# Altium PCB AT short bus with break-away tab ( 7 x 4.5 inches).PCBDOC
Units mil, origin at the board's own origin, x right, y up, seen from the top; angles counter-clockwise.
Board outline 7000 x 5250 mil, 10 copper layers (TopLayer, MidLayer1, MidLayer2, MidLayer3, MidLayer4, MidLayer5, MidLayer6, MidLayer7, MidLayer8, BottomLayer); 1 components, 0 nets, 103 pads, 0 vias.
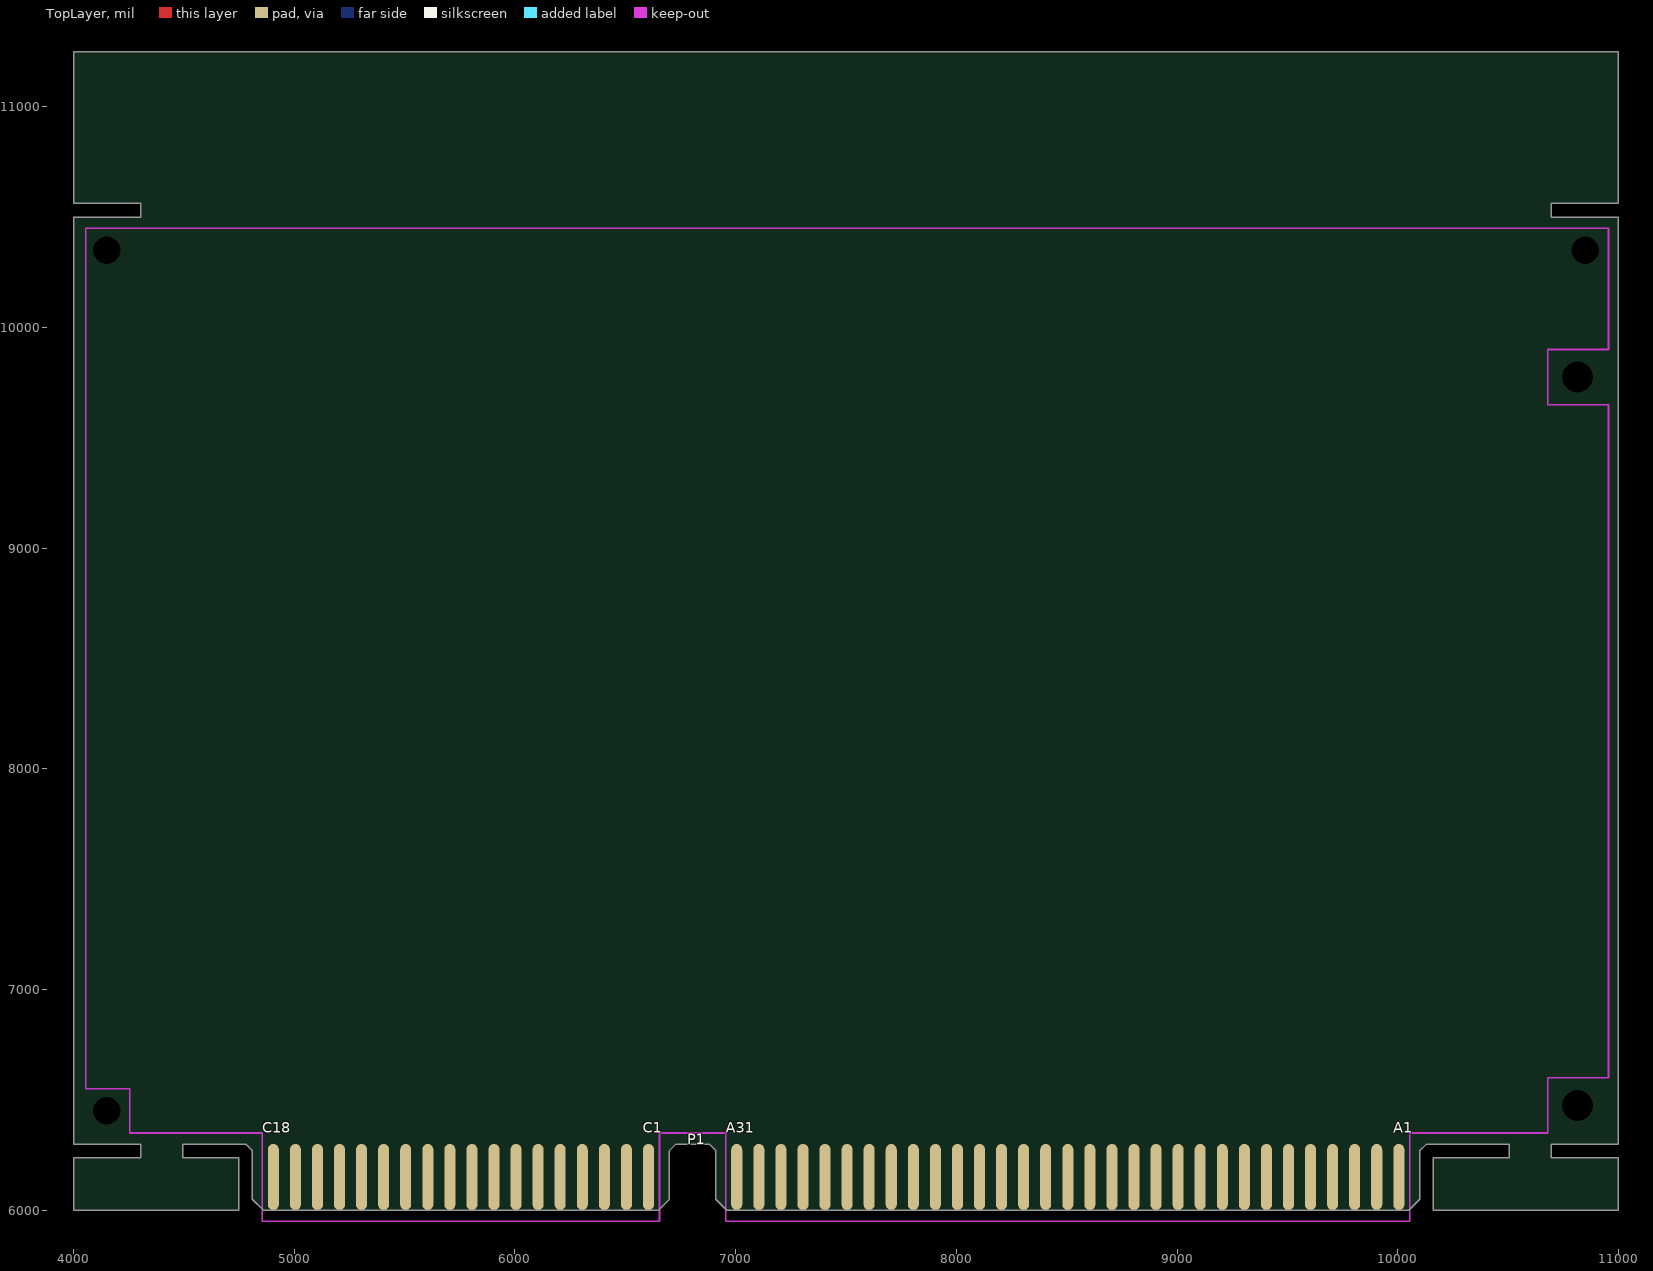
[diagram p0: TopLayer view]
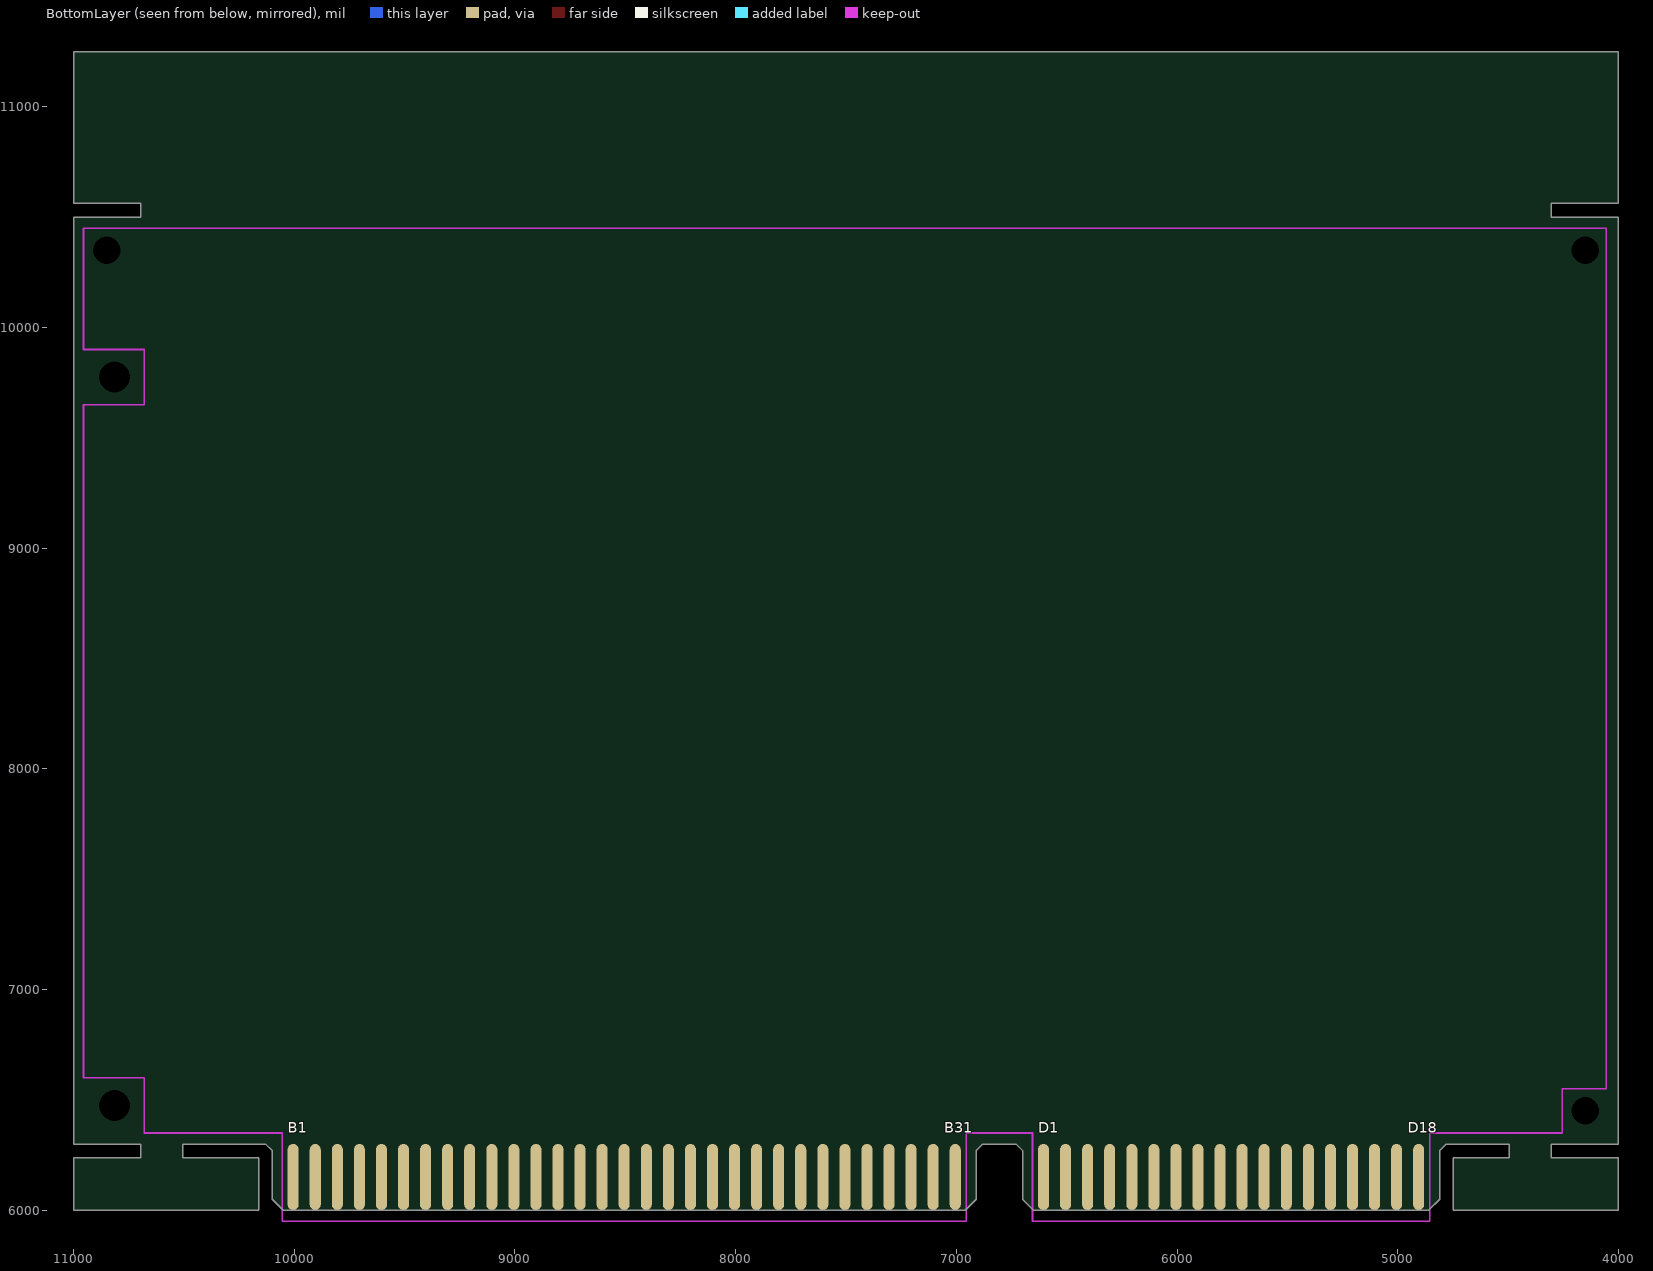
[diagram p1: BottomLayer view, seen from below]
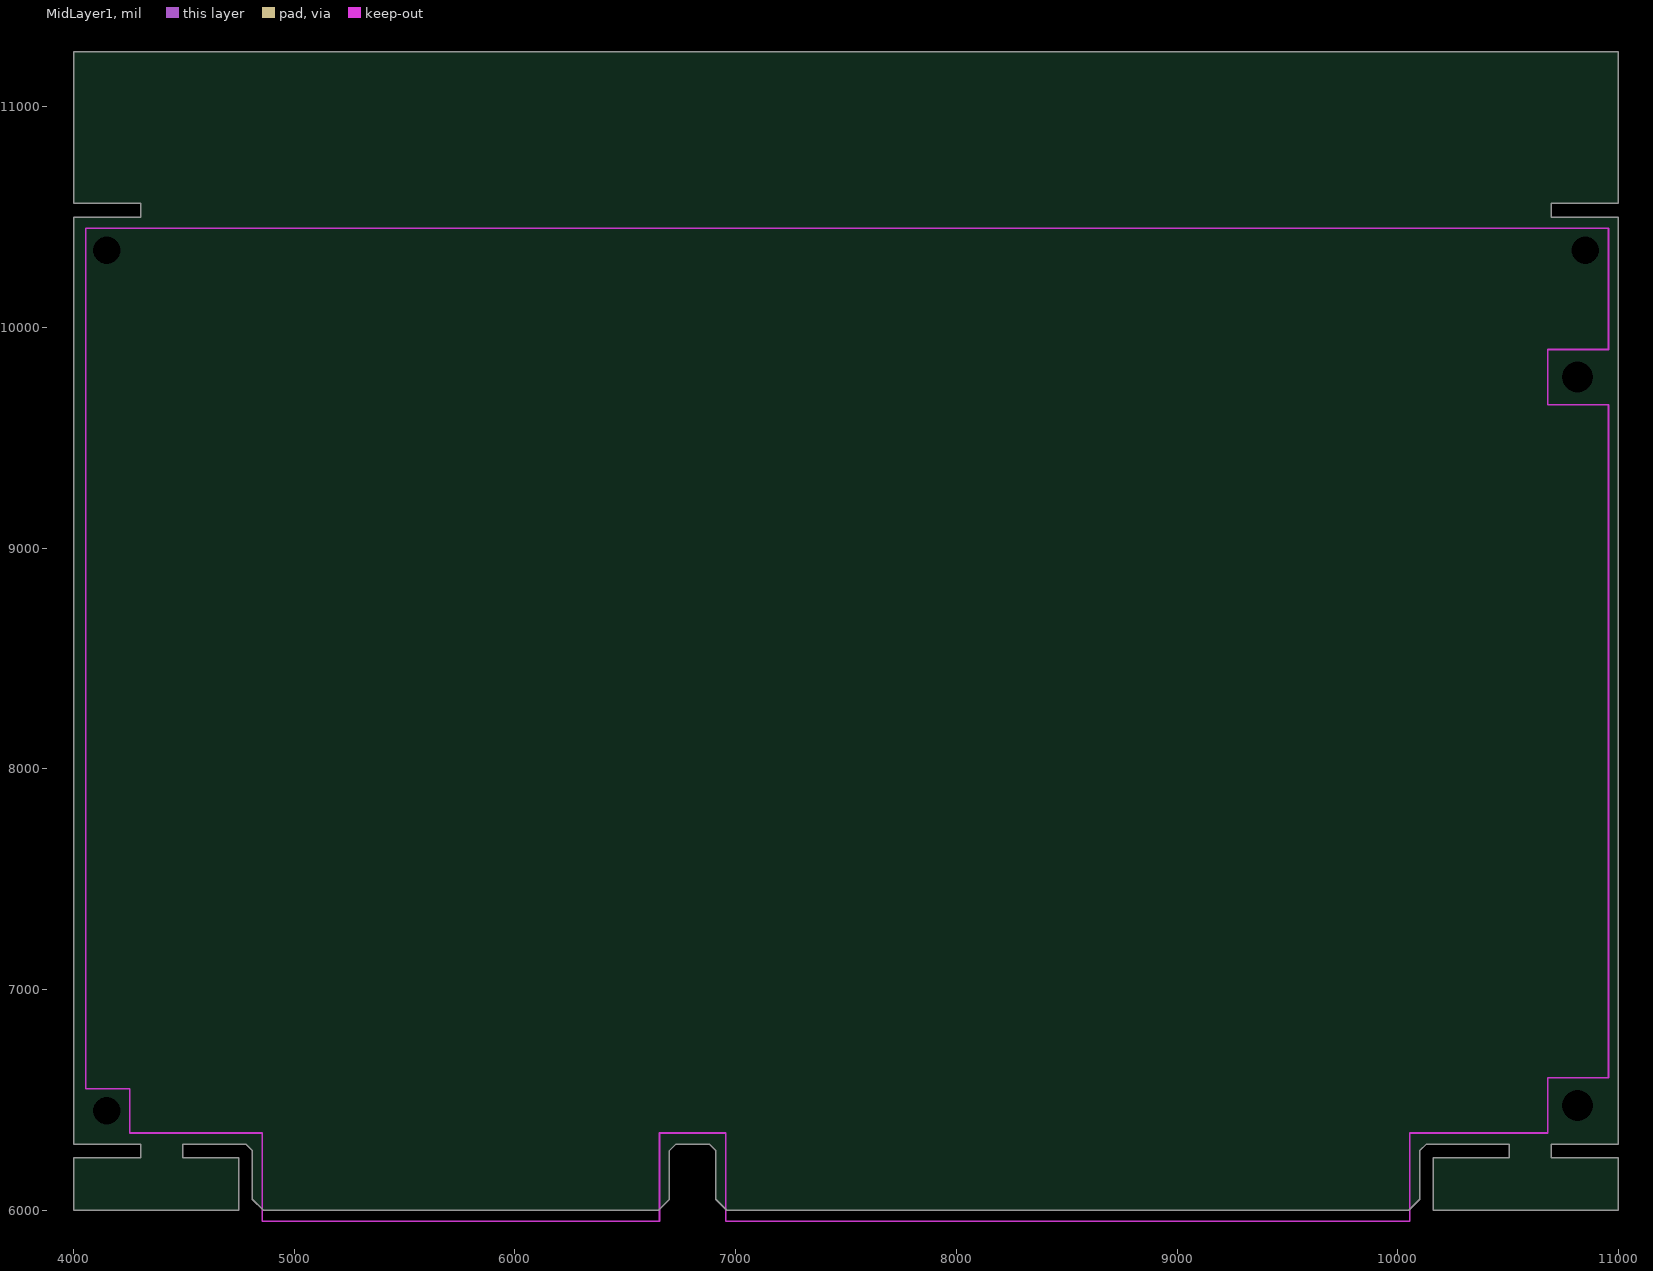
[diagram p2: MidLayer1]
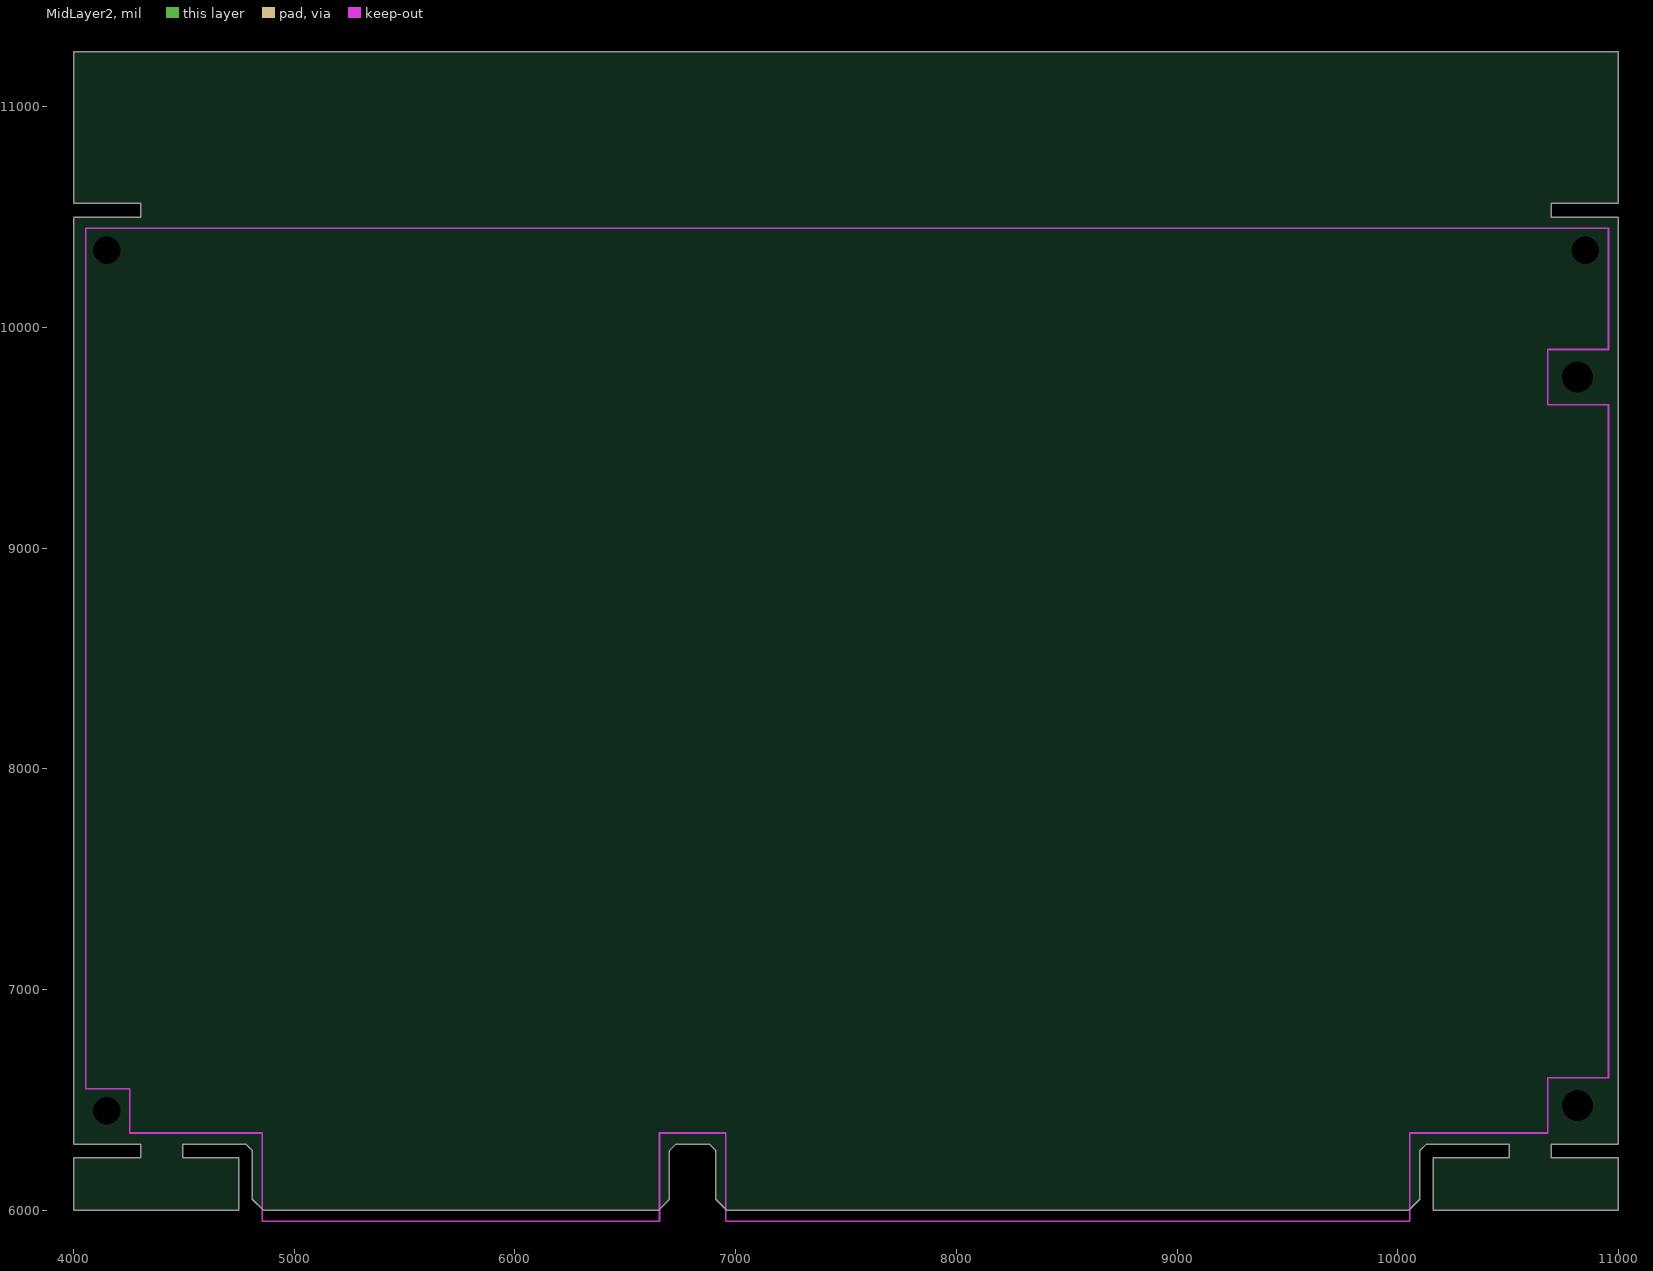
[diagram p3: MidLayer2]
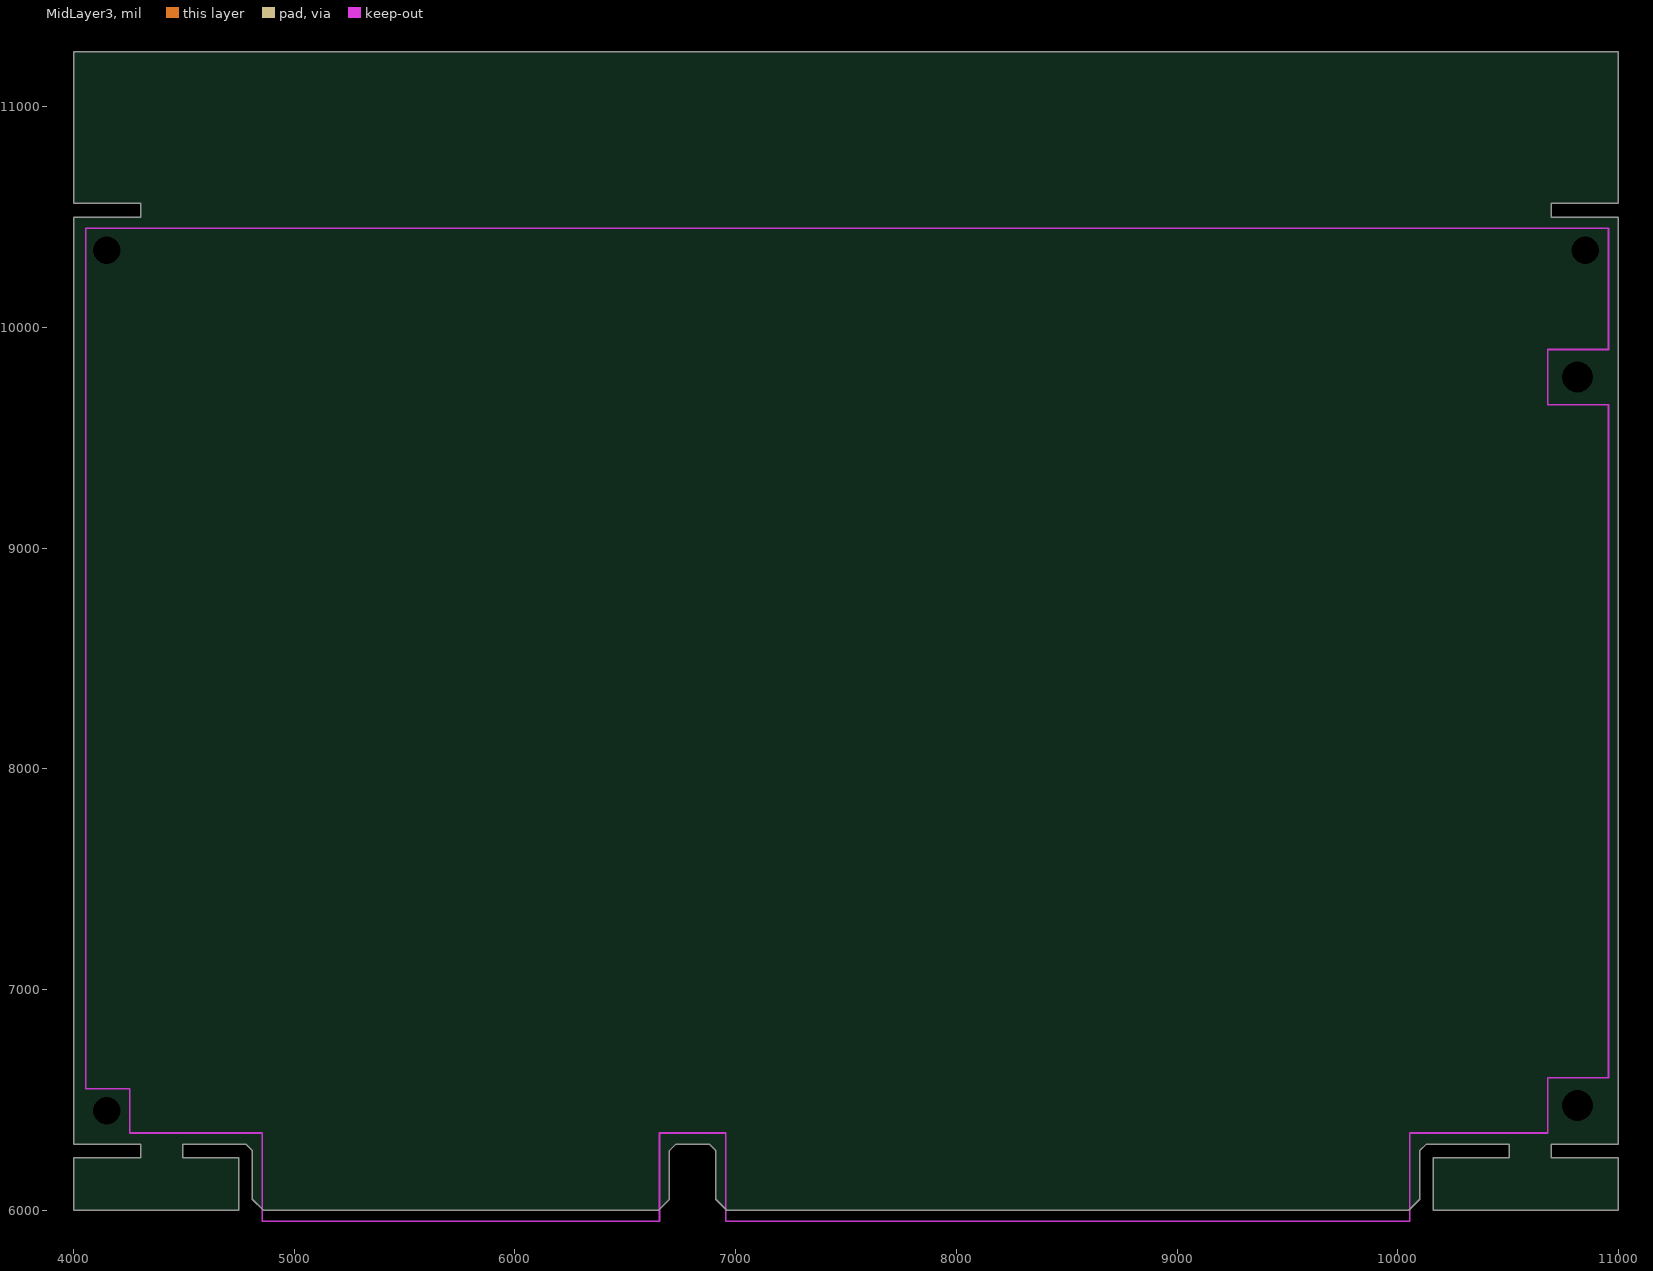
[diagram p4: MidLayer3]
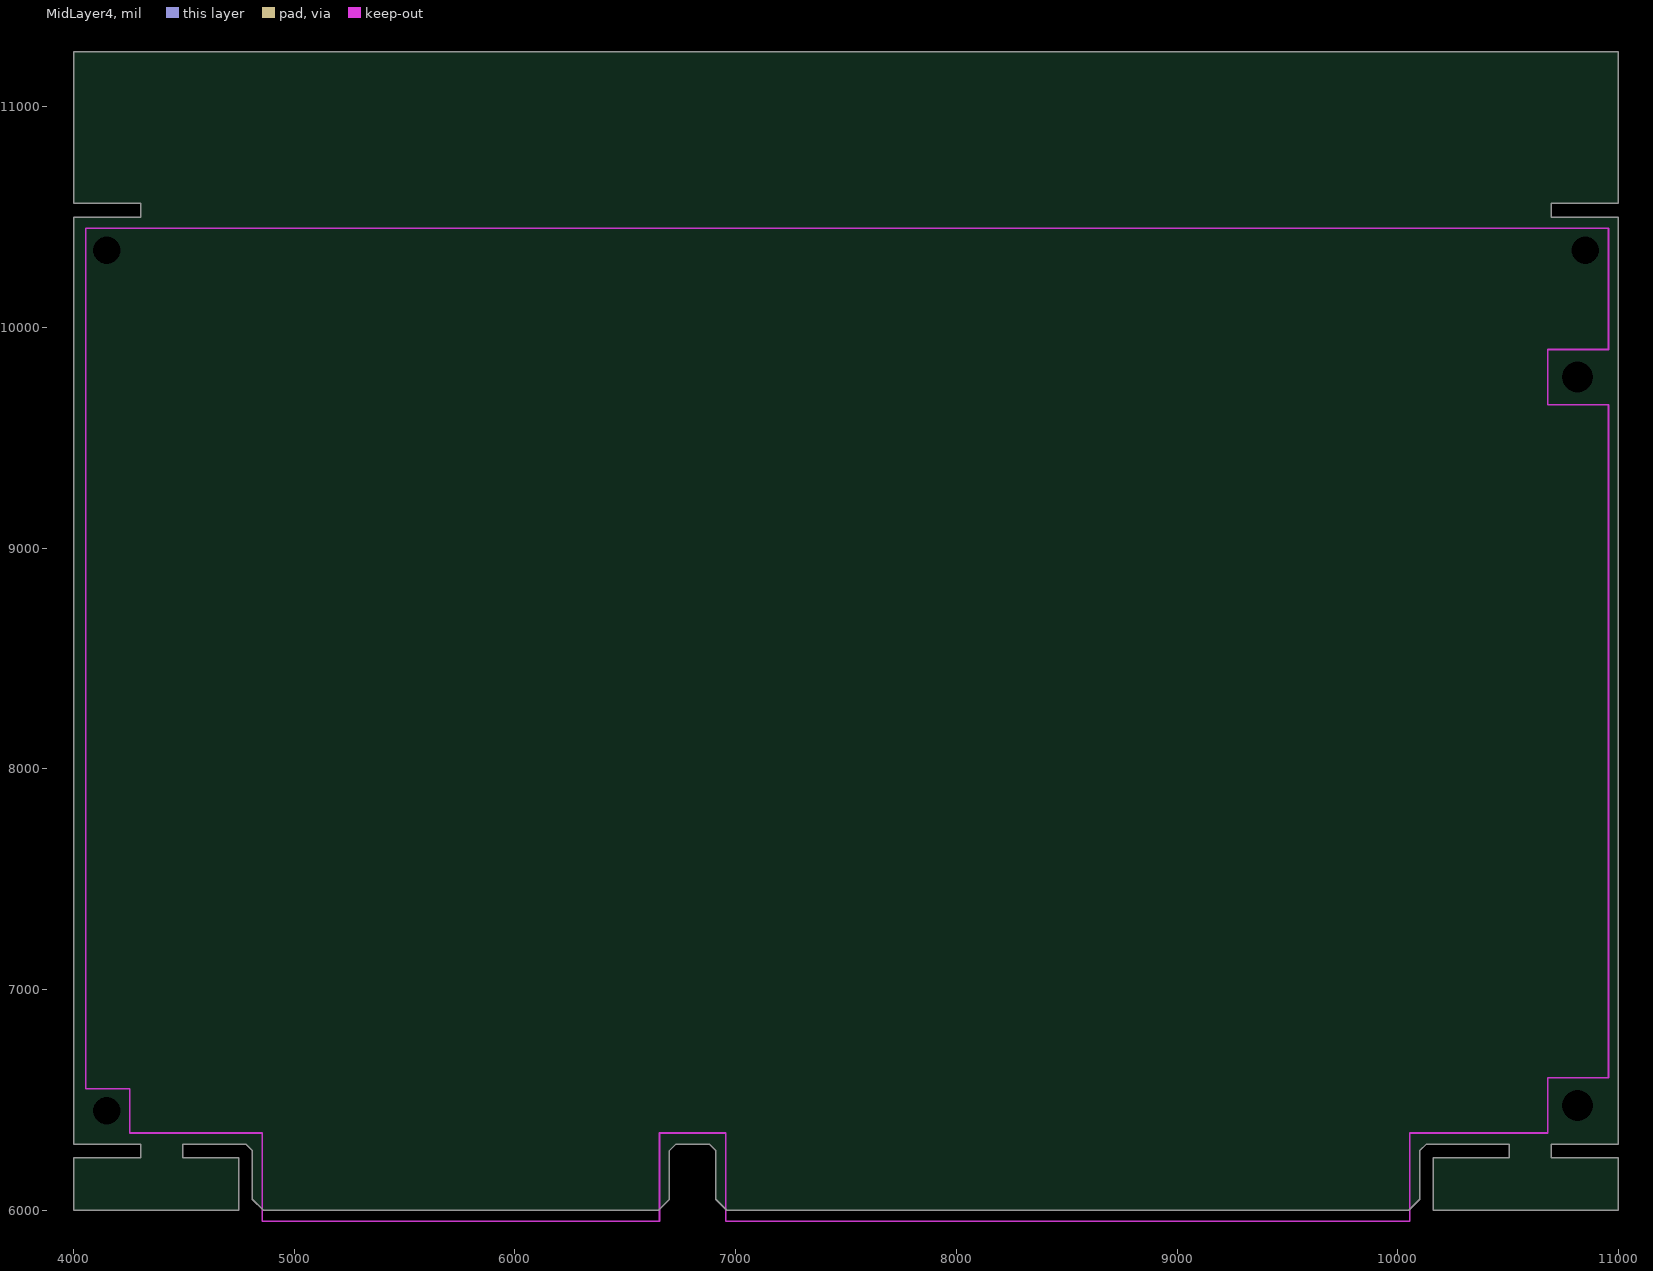
[diagram p5: MidLayer4]
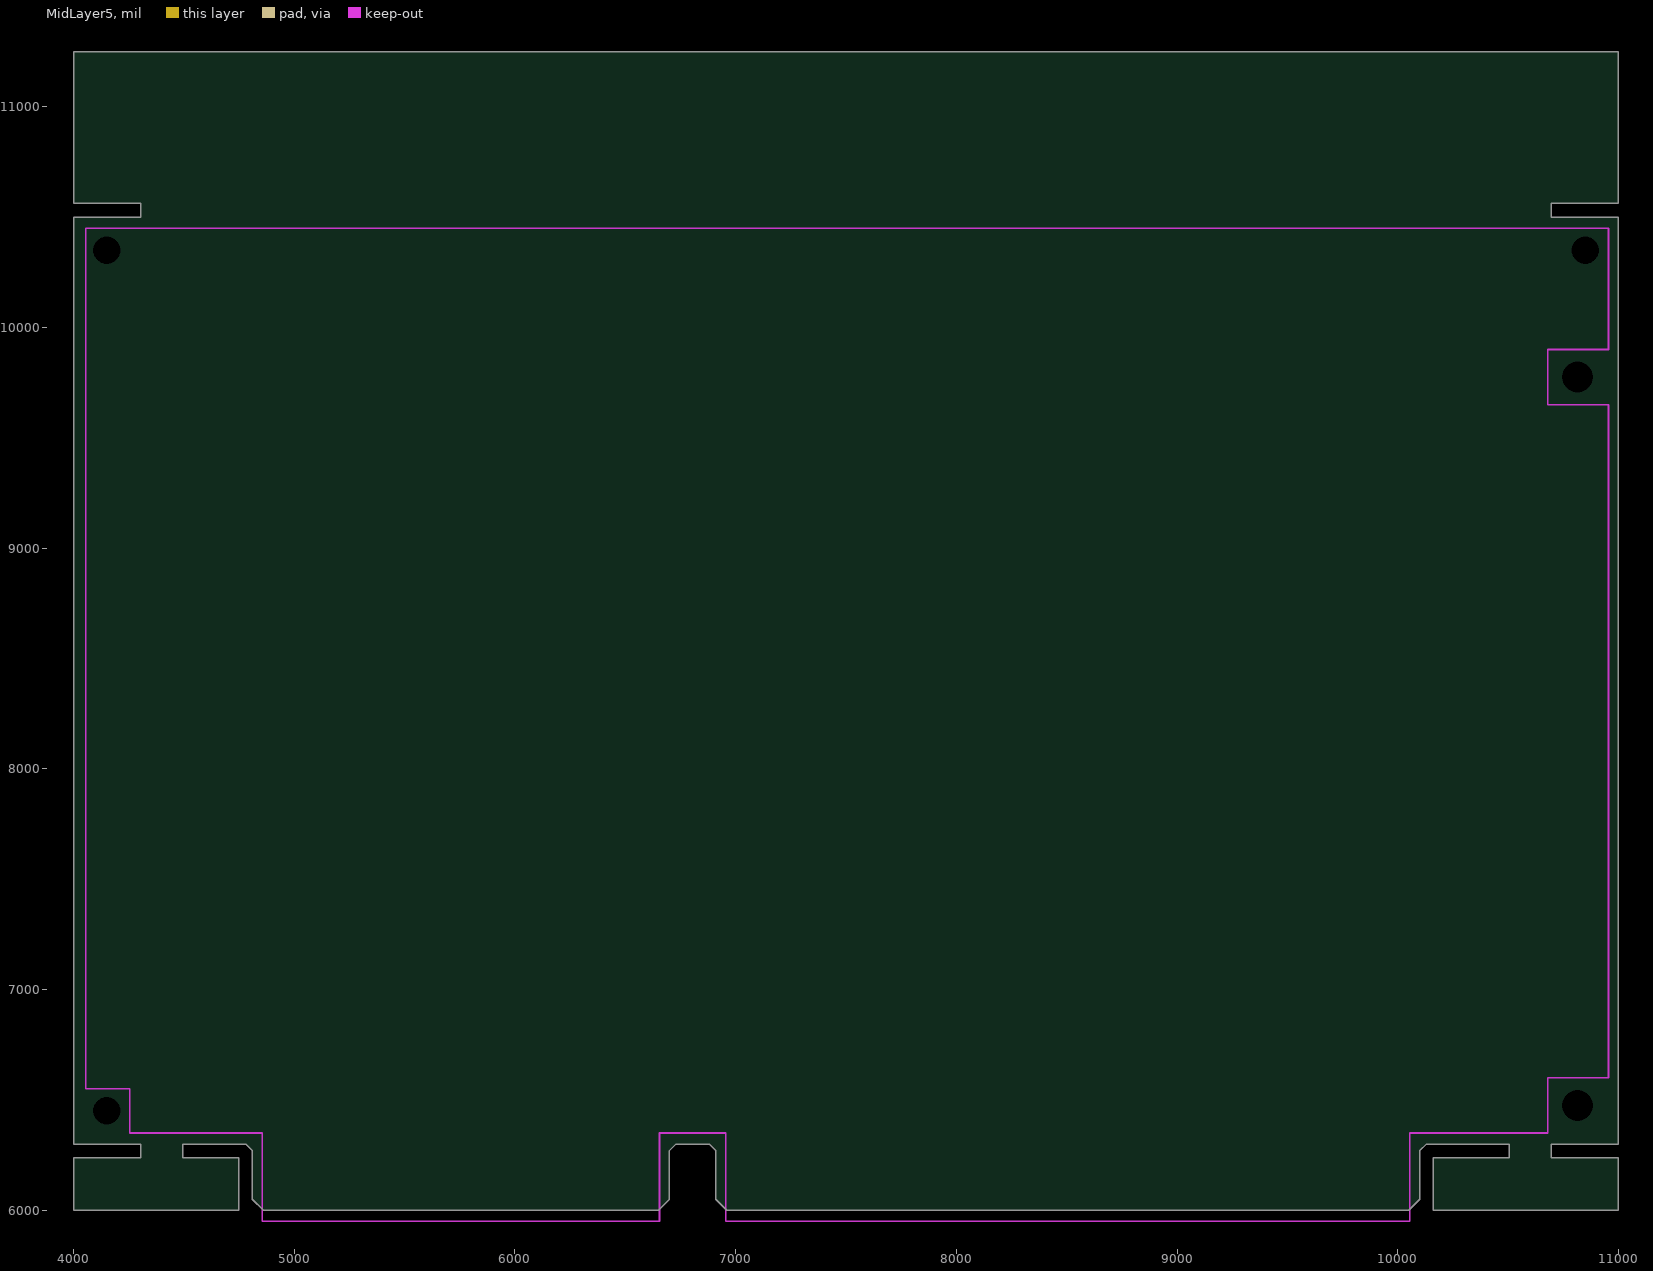
[diagram p6: MidLayer5]
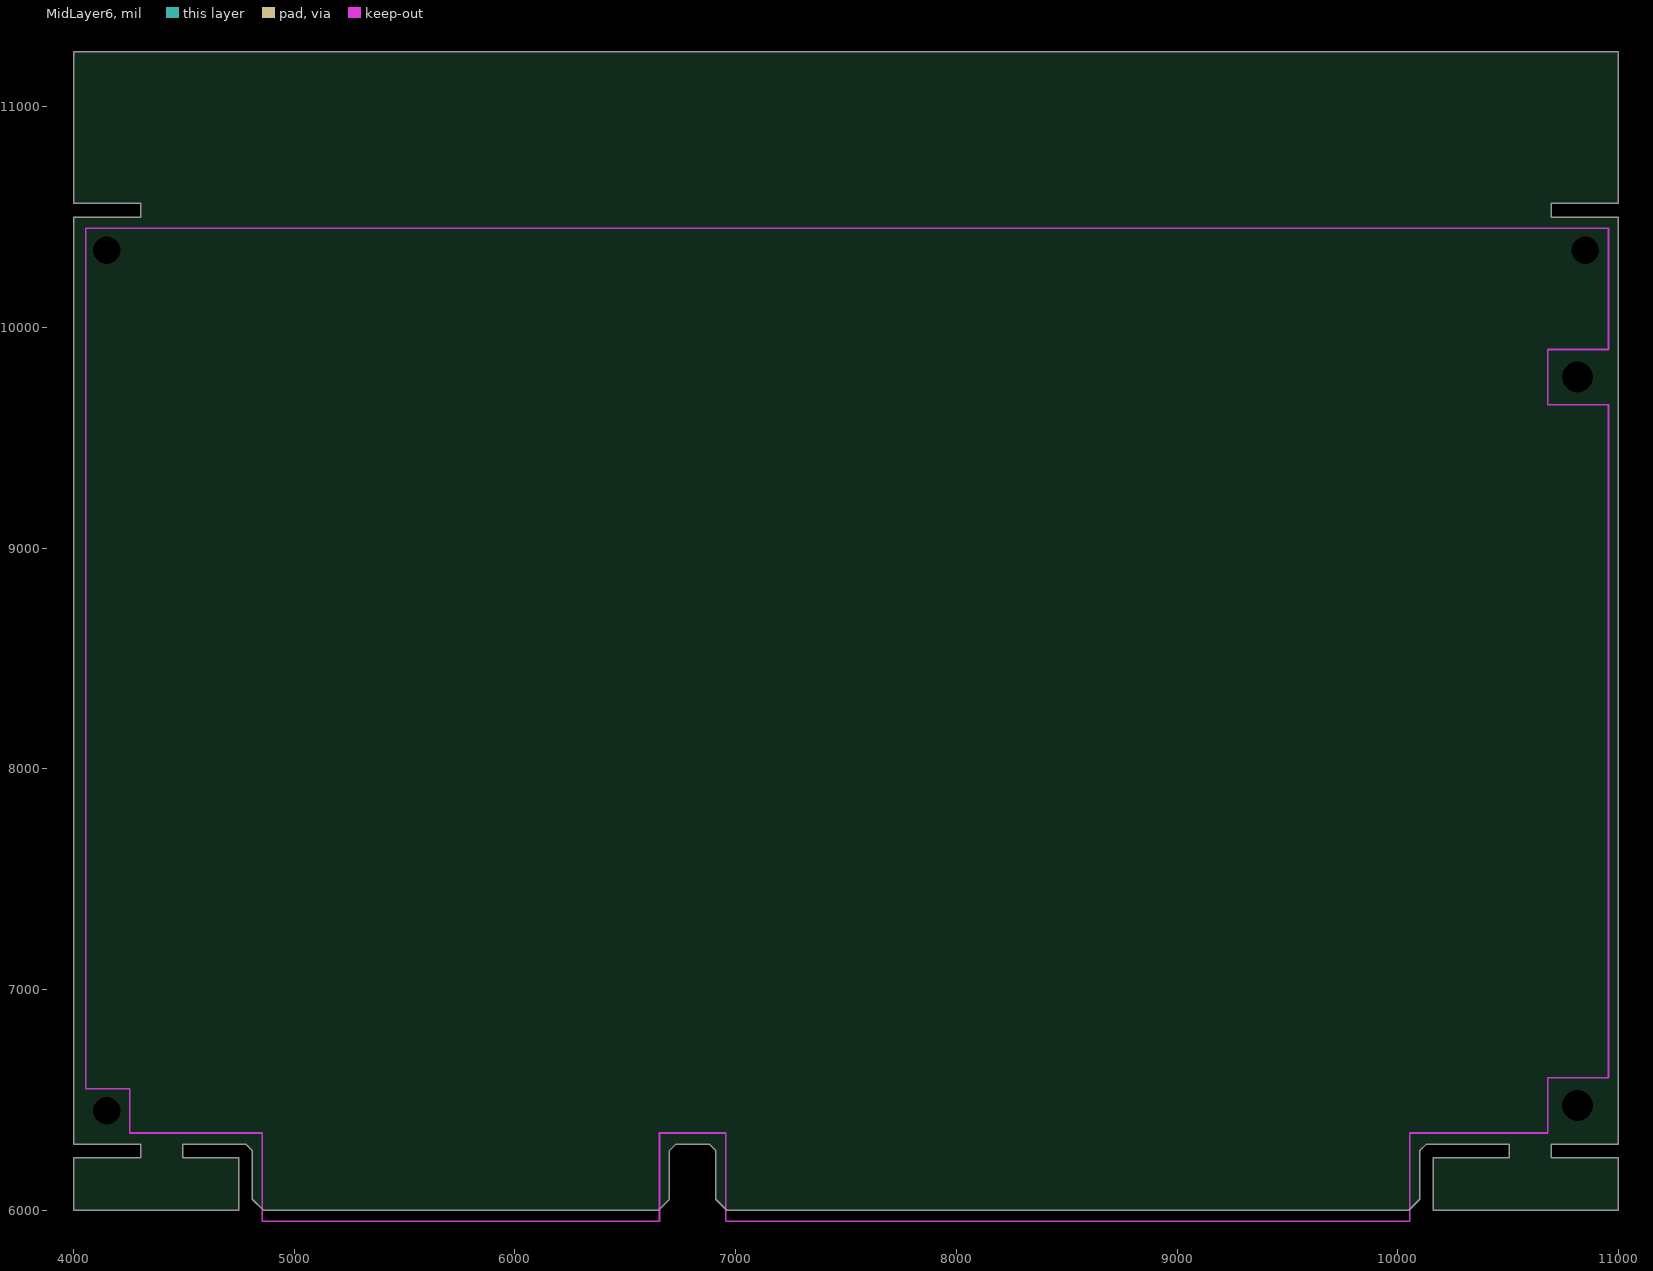
[diagram p7: MidLayer6]
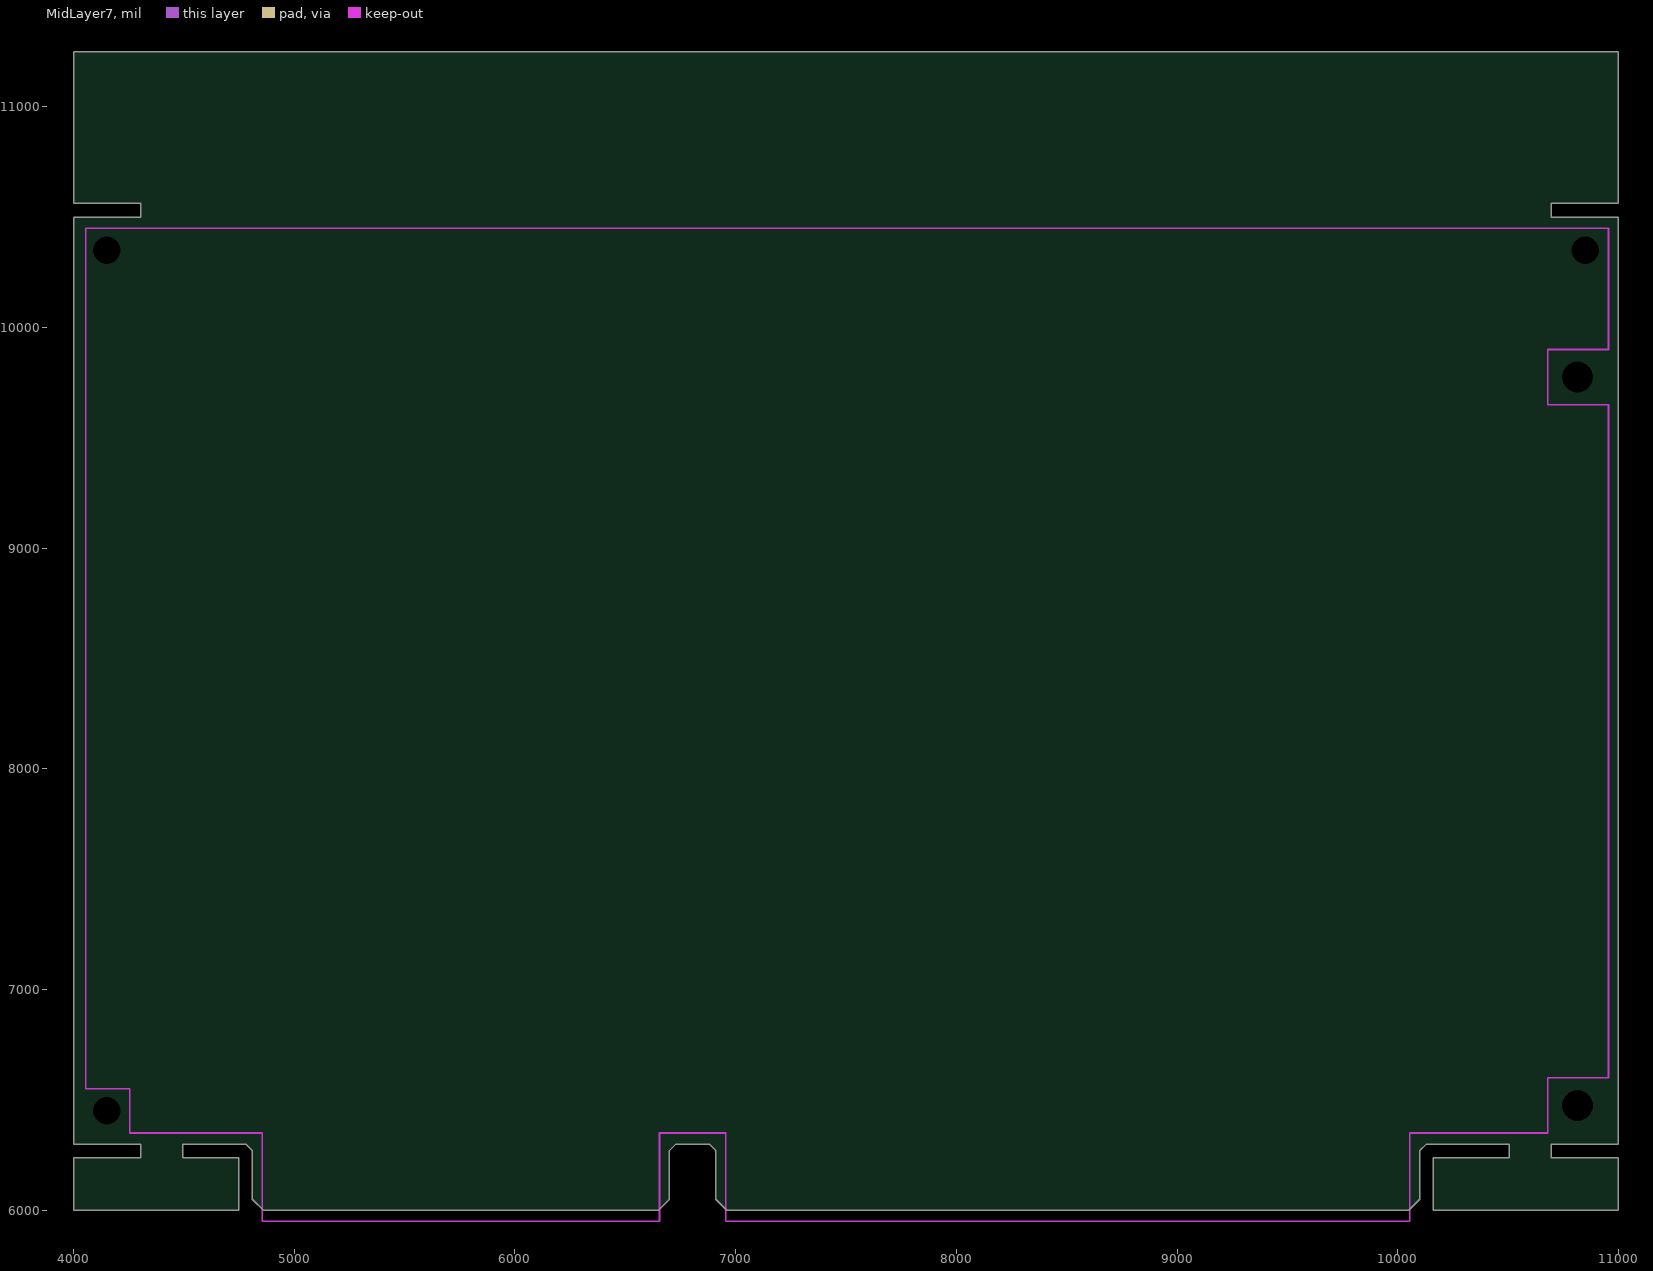
[diagram p8: MidLayer7]
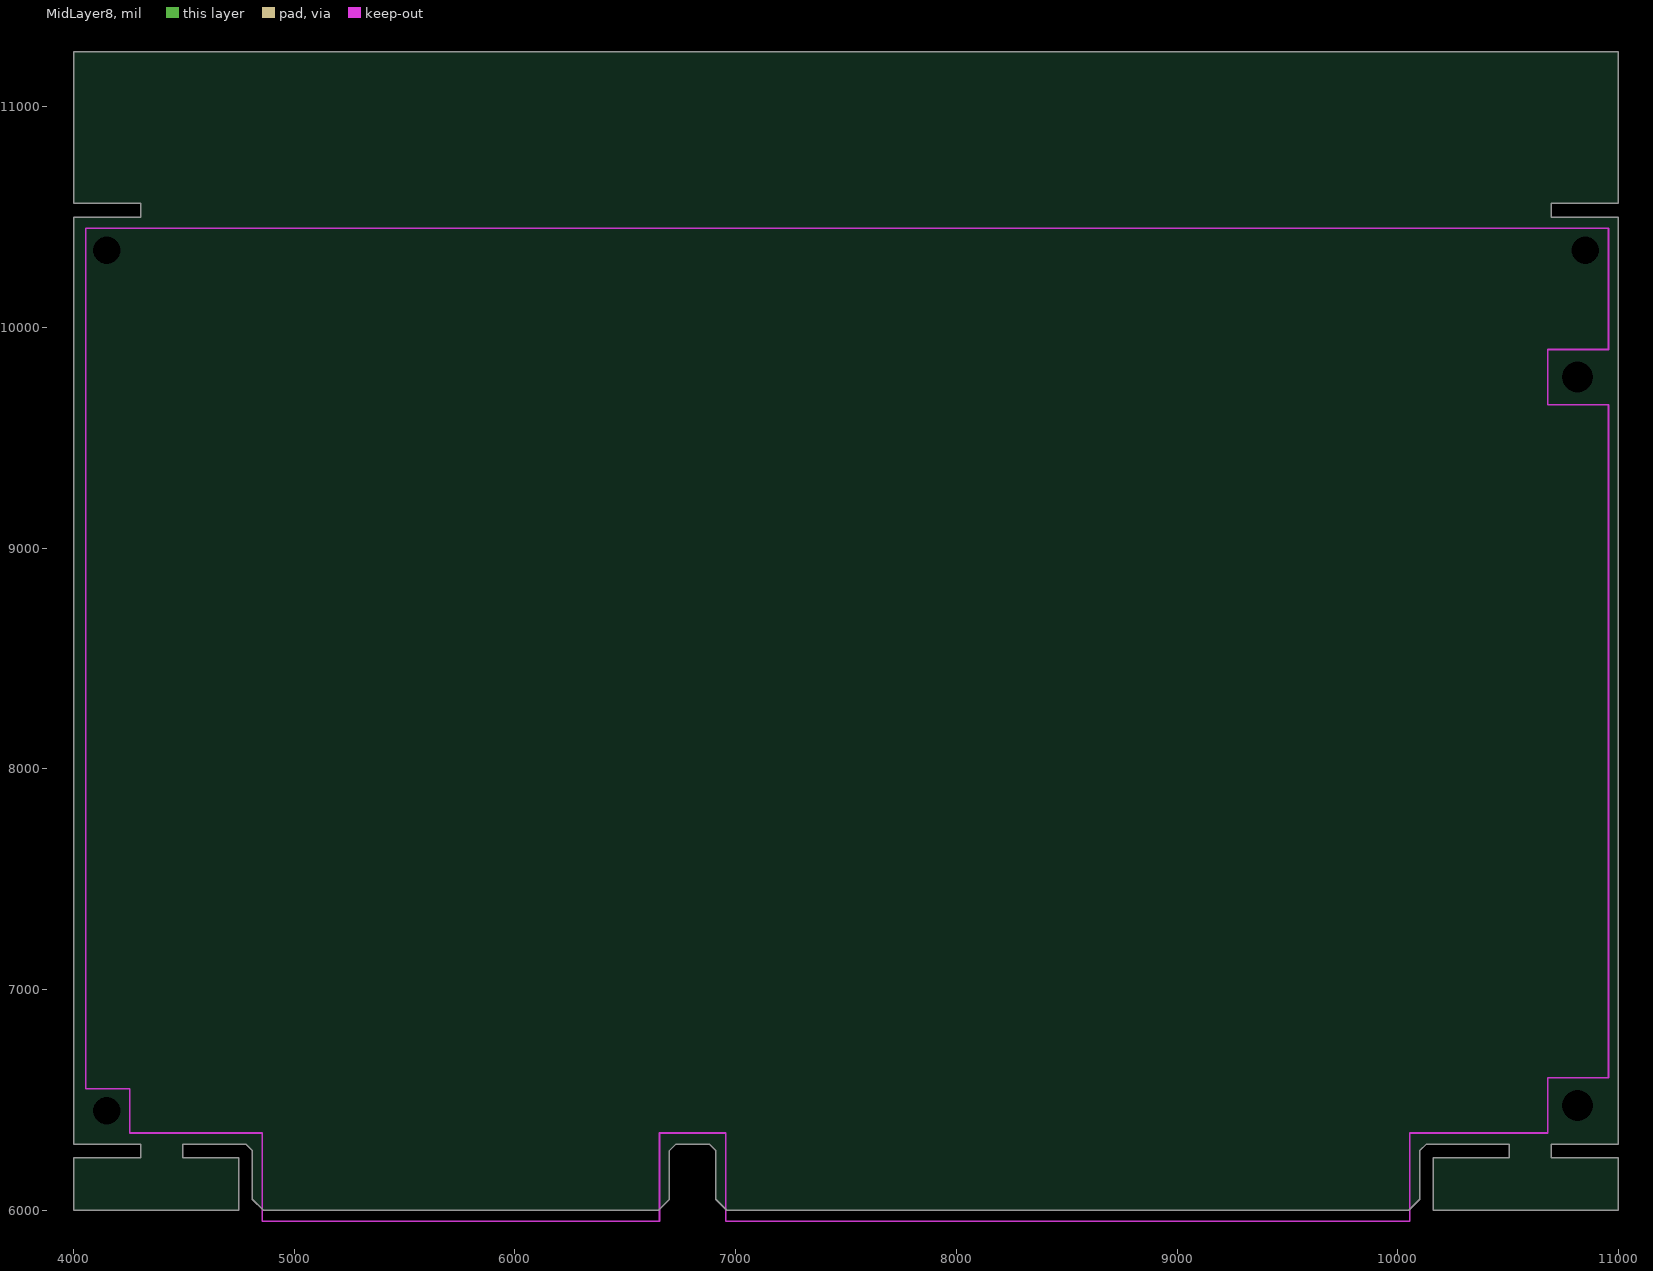
[diagram p9: MidLayer8]

## Layer stack, top to bottom
TopLayer: signal copper 1.4
Dielectric: core 12.6, FR-4, Dk 4.8
MidLayer1: signal copper 1.4
Dielectric: prepreg 12.6, FR-4, Dk 4.8
MidLayer2: signal copper 1.4
Dielectric: core 12.6, FR-4, Dk 4.8
MidLayer3: signal copper 1.4
Dielectric: prepreg 12.6, FR-4, Dk 4.8
MidLayer4: signal copper 1.4
Dielectric: core 12.6, FR-4, Dk 4.8
MidLayer5: signal copper 1.4
Dielectric: prepreg 12.6, FR-4, Dk 4.8
MidLayer6: signal copper 1.4
Dielectric: core 12.6, FR-4, Dk 4.8
MidLayer7: signal copper 1.4
Dielectric: prepreg 12.6, FR-4, Dk 4.8
MidLayer8: signal copper 1.4
Dielectric: core 12.6, FR-4, Dk 4.8
BottomLayer: signal copper 1.4

## Board outline
4000,6000 4748,6000 4748,6238 4495,6238 4495,6300 4780,6300 4810,6270 4810,6050 4860,6000 6650,6000 6700,6050 6700,6270 6730,6300 6880,6300 6910,6270 6910,6050 6960,6000 10050,6000 10100,6050 10100,6270 10130,6300 10505,6300 10505,6238 10162,6238 10162,6000 11000,6000 11000,6238 10695,6238 10695,6300 11000,6300 11000,10500 10695,10500 10695,10562 11000,10562 11000,11250 4000,11250 4000,10562 4305,10562 4305,10500 4000,10500 4000,6300 4305,6300 4305,6238 4000,6238

## Design rules (kind name [scope] priority, off if disabled: settings)
Clearance [All] p1: gap=10
FabricationTestPointUsage TestPointUsage [All] p1: valid=0 allowmultiple=FALSE
FabricationTestpoint Testpoint [All] p1: side=3 testpointundercomponent=TRUE minsize=40 maxsize=100 preferedsize=60 minholesize=20 maxholesize=40 preferedholesize=32 testpointgrid=1 allowsidetop=TRUE allowsidebottom=TRUE usegrid=TRUE gridtolerance=0.01
PasteMaskExpansion PasteMaskExpansion_1 [InComponent('P1')] p1: expansion=-150
PasteMaskExpansion [All] p2: expansion=0
PlaneClearance [All] p1: clearance=10
PolygonConnect [All] p1: connectstyle=Relief reliefconductorwidth=10 reliefentries=4 polygonreliefangle="90 Angle"
RoutingVias [All] p1: holewidth=28 width=50 viastyle="Through Hole" minholewidth=28 minwidth=50 maxholewidth=28 maxwidth=50
SilkscreenOverComponentPads [All] p1: minsilkscreentomaskgap=10
SolderMaskExpansion SolderMaskExpansion_1 [HasPad('Free-22')] p1: expansion=20
SolderMaskExpansion [HasPad('Free-21')] p2: expansion=20
SolderMaskExpansion SolderMaskExpansion_2 [All] p3: expansion=2
Width [All] p1: maxlimit=10 minlimit=10 preferedwidth=10
23 further rules are at their usual default settings.

## Components (designator, comment, footprint, x,y, rotation, side; value= is the part's Value field where it differs from the comment)
P1 "PCATEDGE" PCATEDGE 10005,6150 r0 top locked

## Footprints (in the part's own frame and the unit in brackets; to place one, negate y for a bottom-side part, rotate by r counter-clockwise, add the part's x,y. Pads: shape width x height; smd on the part's side, far side on the other; paste and mask are expansions set on the pad)
PCATEDGE [mil]
  oval 50x300 smd: A1(0,0) A2(-100,0) A3(-200,0) A4(-300,0) A5(-400,0) A6(-500,0) A7(-600,0) A8(-700,0) A9(-800,0) A10(-900,0) A11(-1000,0) A12(-1100,0) A13(-1200,0) A14(-1300,0) A15(-1400,0) A16(-1500,0) A17(-1600,0) A18(-1700,0) A19(-1800,0) A20(-1900,0) A21(-2000,0) A22(-2100,0) A23(-2200,0) A24(-2300,0) A25(-2400,0) A26(-2500,0) A27(-2600,0) A28(-2700,0) A29(-2800,0) A30(-2900,0) A31(-3000,0) C1(-3400,0) C2(-3500,0) C3(-3600,0) C4(-3700,0) C5(-3800,0) C6(-3900,0) C7(-4000,0) C8(-4100,0) C9(-4200,0) C10(-4300,0) C11(-4400,0) C12(-4500,0) C13(-4600,0) C14(-4700,0) C15(-4800,0) C16(-4900,0) C17(-5000,0) C18(-5100,0)
  oval 50x300 smd far side: B1(0,0) B2(-100,0) B3(-200,0) B4(-300,0) B5(-400,0) B6(-500,0) B7(-600,0) B8(-700,0) B9(-800,0) B10(-900,0) B11(-1000,0) B12(-1100,0) B13(-1200,0) B14(-1300,0) B15(-1400,0) B16(-1500,0) B17(-1600,0) B18(-1700,0) B19(-1800,0) B20(-1900,0) B21(-2000,0) B22(-2100,0) B23(-2200,0) B24(-2300,0) B25(-2400,0) B26(-2500,0) B27(-2600,0) B28(-2700,0) B29(-2800,0) B30(-2900,0) B31(-3000,0) D1(-3400,0) D2(-3500,0) D3(-3600,0) D4(-3700,0) D5(-3800,0) D6(-3900,0) D7(-4000,0) D8(-4100,0) D9(-4200,0) D10(-4300,0) D11(-4400,0) D12(-4500,0) D13(-4600,0) D14(-4700,0) D15(-4800,0) D16(-4900,0) D17(-5000,0) D18(-5100,0)

## Free pads (board coordinates)
  round 50 hole 140: 1(10815,6475) 2(10815,9775)
  round 50 hole 125: 3(10850,10350) 4(4150,10350) 5(4150,6450)

## Nets (pads, with @x,y where several pads share a name; then routed paths per layer and width w, separated by ;. In a path a pad name is that pad's centre, name@x,y a point inside that pad or via, vN(x,y) a via of type N, cw(c..) or ccw(c..) an arc to the next point about the centre after c; other vN are vias at no path point)
pads on no net: P1.A1 P1.A2 P1.A3 P1.A4 P1.A5 P1.A6 P1.A7 P1.A8 P1.A9 P1.A10 P1.A11 P1.A12 P1.A13 P1.A14 P1.A15 P1.A16 P1.A17 P1.A18 P1.A19 P1.A20 P1.A21 P1.A22 P1.A23 P1.A24 P1.A25 P1.A26 P1.A27 P1.A28 P1.A29 P1.A30 P1.A31 P1.B1 P1.B2 P1.B3 P1.B4 P1.B5 P1.B6 P1.B7 P1.B8 P1.B9 P1.B10 P1.B11 P1.B12 P1.B13 P1.B14 P1.B15 P1.B16 P1.B17 P1.B18 P1.B19 P1.B20 P1.B21 P1.B22 P1.B23 P1.B24 P1.B25 P1.B26 P1.B27 P1.B28 P1.B29 P1.B30 P1.B31 P1.C1 P1.C2 P1.C3 P1.C4 P1.C5 P1.C6 P1.C7 P1.C8 P1.C9 P1.C10 P1.C11 P1.C12 P1.C13 P1.C14 P1.C15 P1.C16 P1.C17 P1.C18 P1.D1 P1.D2 P1.D3 P1.D4 P1.D5 P1.D6 P1.D7 P1.D8 P1.D9 P1.D10 P1.D11 P1.D12 P1.D13 P1.D14 P1.D15 P1.D16 P1.D17 P1.D18

## Keep-outs
KeepOutLayer:
  lines w8: 4055,6550 4255,6550 4255,6350 4855,6350 4855,5950 6655,5950 6655,6350 6955,6350 6955,5950 10055,5950 10055,6350 10680,6350 10680,6600 10955,6600 10955,9650 10680,9650 10680,9900 10955,9900 10955,10450 4055,10450 4055,6550

## Other copper
TopLayer:
  text ".GTL" at 10700,11400 h90
MidLayer1:
  text ".G1" at 10700,11400 h90
MidLayer2:
  text ".G2" at 10700,11400 h90
MidLayer3:
  text ".G3" at 10700,11400 h90
MidLayer4:
  text ".G4" at 10700,11400 h90
MidLayer5:
  text ".G5" at 10700,11400 h90
MidLayer6:
  text ".G6" at 10700,11400 h90
MidLayer7:
  text ".G7" at 10700,11400 h90
MidLayer8:
  text ".G8" at 10700,11400 h90
BottomLayer:
  text "P/N XXXXXX-XXX REV A" at 5320,11450 h75
  text ".GBL" at 10700,11400 h90

## Silkscreen, mask and mechanical layers (free items; w line width, h text height)
TopOverlay:
  rectangle: 4281,11653 5031,11853
  rectangle: 4281,11943 5031,12143
  lines w10: 5392.59,12045.97 ccw(c5441,12085.5) 5392.71,12045.83
  text "C" at 5496,12048 h60
  text "2002 COMPANY NAME" at 5646,12048 h75
  text "S/N" at 4031,12000.5 h75
  text "BOARD NAME" at 5496,11873 h75
  text "ASSY NO.: XXXXXX" at 5496,11723 h75
  text "REV" at 4031,11703 h75
  text ".GTO" at 10700,11400 h90
TopPaste:
  text ".GTP" at 10700,11400 h90
BottomPaste:
  text ".GBP" at 10700,11400 h90
TopSolder:
  rectangle: 6885,5975 10125,6305
  rectangle: 4785,5975 6725,6305
  text ".GTS" at 10700,11400 h90
BottomSolder:
  rectangle: 6885,5975 10125,6305
  rectangle: 4785,5975 6725,6305
  text ".GBS" at 10700,11400 h90
Mechanical1:
  lines w20: 4000,6000 4748,6000 4748,6238 4495,6238 4495,6300 4780,6300 4810,6270 4810,6050 4860,6000 6650,6000 6700,6050 6700,6270 6730,6300 6880,6300 6910,6270 6910,6050 6960,6000 10050,6000 10100,6050 10100,6270 10130,6300 10505,6300 10505,6238 10162,6238 10162,6000 11000,6000 11000,6238 10695,6238 10695,6300 11000,6300 11000,10500 10695,10500 10695,10562 11000,10562 11000,11250 4000,11250 4000,10562 4305,10562 4305,10500 4000,10500 4000,6300 4305,6300 4305,6238 4000,6238 4000,6000 ; 4495,10500 7405,10500 7405,10562 4495,10562 4495,10500 ; 7595,10500 10505,10500 10505,10562 7595,10562 7595,10500
Mechanical3:
  lines w10: 10690,6425 10690,6375 10740,6375 ; 10690,6450 10690,6500 ; 10690,6525 10690,6575 10740,6575 ; 10690,9725 10690,9675 10740,9675 ; 10690,9750 10690,9800 ; 10690,9825 10690,9875 10740,9875 ; 10765,6375 10815,6375 ; 10765,6575 10815,6575 ; 10765,9675 10815,9675 ; 10765,9875 10815,9875 ; 10840,6375 10890,6375 ; 10840,6575 10890,6575 ; 10840,9675 10890,9675 ; 10840,9875 10890,9875 ; 10915,6375 10965,6375 ; 10915,6575 10965,6575 ; 10915,9675 10965,9675 ; 10915,9875 10965,9875 ; 11000,6375 11040,6375 11040,5225 11065,5225 11065,9950 11490,9950 11490,9975 11040,9975 11040,9875 11000,9875 ; 11000,6575 11040,6575 11040,9675 11000,9675
Mechanical4:
  circle w10: c4865.68,6020.67 r100
  lines w10: 12480,7975 12555,7900 12630,7975 12705,7900 12780,7975 12855,7900 12930,7975 ; 12961.25,6893.75 13205,6650 13405,6650 ; 14105,8100 14830,8100 ; 15455,6650 15205,6650 15498.75,6943.75 ; 16405,6850 16405,7250 16605,7350 16205,7450 16405,7550 16405,7950 ; 4840,5880 4843.21,5900.36 4893.84,5878.87 4840,5880 ; 4893.68,5878.67 4948.68,5878.67 4943.68,5898.67 4893.68,5878.67 ; 12855,7000 12980,6912.5 12942.5,6875 12855,7000 ; 15480,6962.5 15605,7050 15517.5,6925 15480,6962.5
  lines w20: 12505,7950 12505,7050 12605,6950 12805,6950 12905,7050 12905,7950 ; 15505,7950 15505,7150 15705,6950 16405,6950
  text ".Pcb_File_Name_No_Path" at 8800,11590 h90
  text ".Printout_Name" at 8800,11400 h90
  text "DETAIL A" at 14105,8150 h120
  text "o" at 14130,6675 h60
  text "o" at 16180,6675 h60
  text ".020 X 45  CHAMFER" at 13480,6600 h90
  text "0.05 X 45  CHAMFER" at 15530,6600 h90
  text "BOTH SIDES" at 13480,6425 h90
  text "TYP 4 PLCS" at 15530,6425 h90
  text "ENTIRE LENGTH OF" at 13480,6250 h90
  text "EDGE CONNECTOR" at 13480,6075 h90
  text "SEE DETAIL A" at 5000,5820 h75
DrillDrawing:
  text ".LEGEND" at 12410,8830 h90
  text "Drilling Details." at 12410,8680 h90

## Dimensions
4150,5980 to 4000,6000 on Mechanical4
3980,6450 to 4000,6300 on Mechanical4

## Text inside footprints (layer, text, board x,y; h text height)
P1: TopOverlay "A1" at 9980,6350 h48; TopOverlay "C1" at 6580,6350 h48; TopOverlay "C18" at 4855,6350 h48; TopOverlay "A31" at 6955,6350 h48; BottomOverlay "D18" at 4955,6350 h48; BottomOverlay "D1" at 6630,6350 h48; BottomOverlay "B31" at 7055,6350 h48; BottomOverlay "B1" at 10030,6350 h48